# Altium PCB PCB_Car.PcbDoc
Units mil, origin at the board's own origin, x right, y up, seen from the top; angles counter-clockwise.
Board outline 4000 x 3000 mil, 2 copper layers (Top Layer, Bottom Layer); 14 components, 22 nets, 35 pads, 0 vias.
Unrouted connection lines stored in the file: 6.
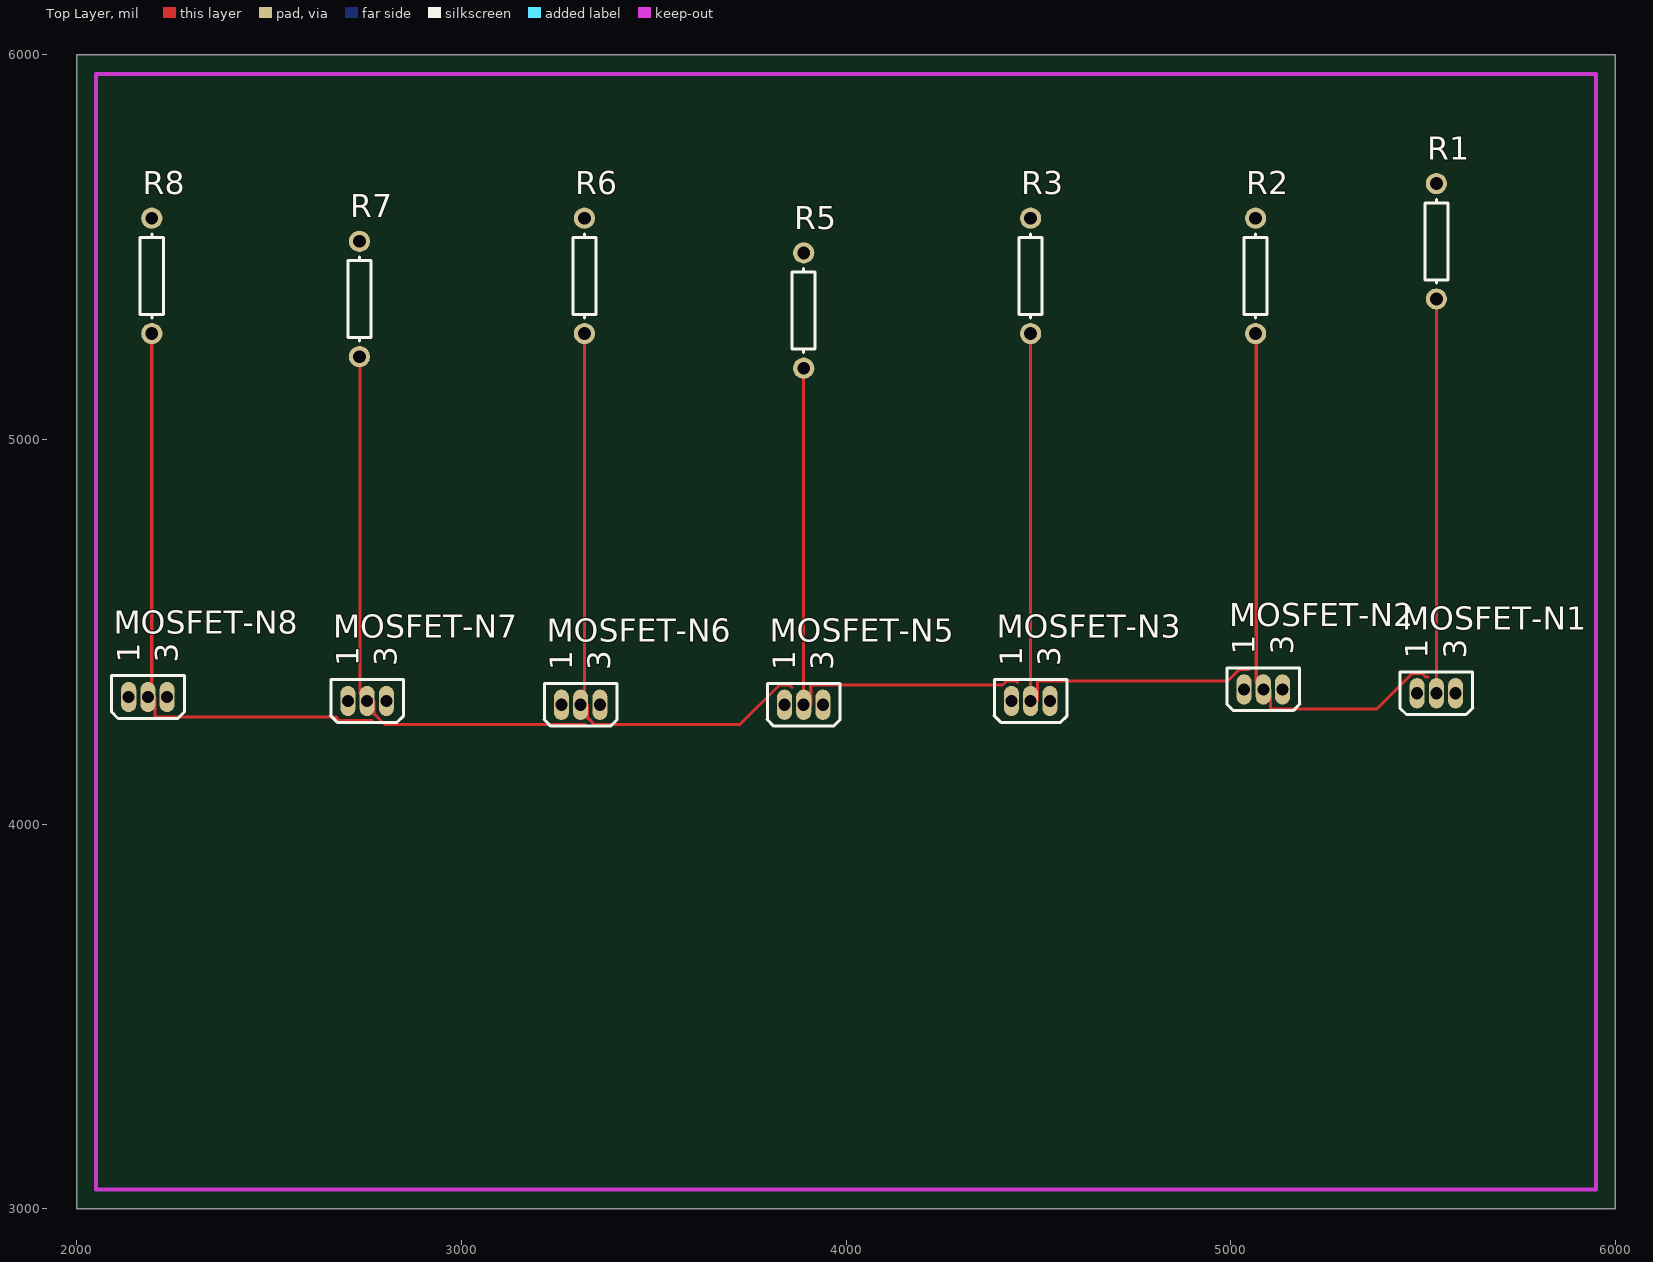
[diagram p0: Top Layer view]
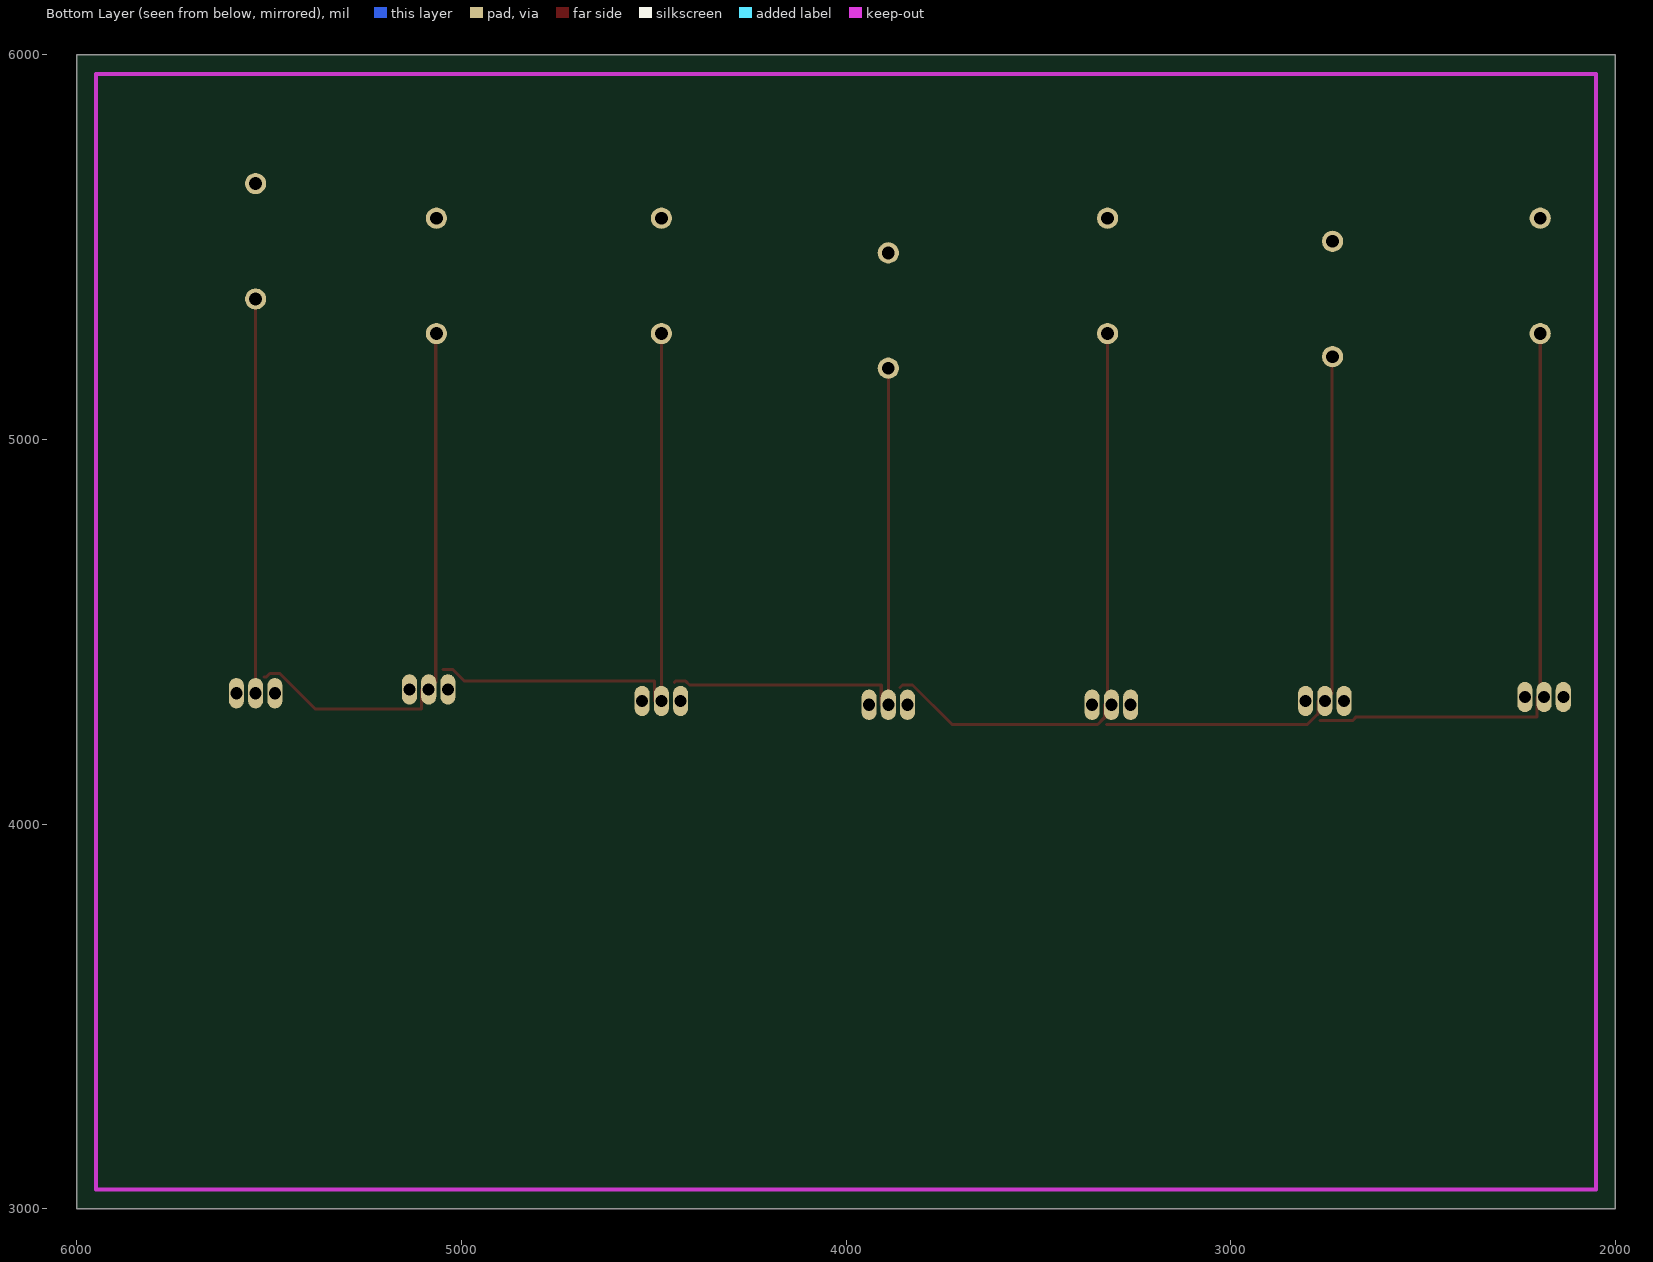
[diagram p1: Bottom Layer view, seen from below]

## Layer stack, top to bottom
Top Solder: solder mask 0.4, Solder Resist, Dk 3.5
Top Layer: signal copper 1.4
Dielectric 1: dielectric 12.6, FR-4, Dk 4.8
Bottom Layer: signal copper 1.4
Bottom Solder: solder mask 0.4, Solder Resist, Dk 3.5

## Board outline
2000,3000 6000,3000 6000,6000 2000,6000

## Design rules (kind name [scope] priority, off if disabled: settings)
Clearance [All] p1: gap=8
PolygonConnect [All] p1: connectstyle=Relief reliefconductorwidth=10 reliefentries=4 polygonreliefangle="90 Angle" airgapwidth=10
RoutingVias [All] p1: holewidth=25 width=40 viastyle="Through Hole" minholewidth=28 minwidth=50 maxholewidth=28 maxwidth=50
SolderMaskExpansion [All] p1: expansion=4
UnpouredPolygon [All] p1: allowunpoured=FALSE
Width [All] p1: maxlimit=8 minlimit=8 preferedwidth=8
29 further rules are at their usual default settings.

## Components (designator, comment, footprint, x,y, rotation, side; value= is the part's Value field where it differs from the comment)
MOSFET-N1 "" E3 5535,4340 r90 top
MOSFET-N2 "" E3 5085,4350 r90 top
MOSFET-N3 "" E3 4480,4320 r90 top
MOSFET-N5 "" E3 3890,4310 r90 top
MOSFET-N6 "" E3 3310,4310 r90 top
MOSFET-N7 "" E3 2755,4320 r90 top
MOSFET-N8 "" E3 2185,4330 r90 top
R1 "" AXIAL-0.3 5535,5515 r270 top
R2 "Res1" AXIAL-0.3 5065,5425 r270 top
R3 "Res1" AXIAL-0.3 4480,5425 r270 top
R5 "Res1" AXIAL-0.3 3890,5335 r270 top
R6 "Res1" AXIAL-0.3 3320,5425 r270 top
R7 "Res1" AXIAL-0.3 2735,5365 r270 top
R8 "Res1" AXIAL-0.3 2195,5425 r270 top

## Footprints (in the part's own frame and the unit in brackets; to place one, negate y for a bottom-side part, rotate by r counter-clockwise, add the part's x,y. Pads: shape width x height; smd on the part's side, far side on the other; paste and mask are expansions set on the pad)
AXIAL-0.3 [mm] "Axial Device, Thru-Hole; 2 Leads; 0.3 in Pin Spacing"
  round 1.4 hole 0.85: 1(-3.81,0) 2(3.81,0)
  silkscreen extent -2.77,-0.76 2.77,0.76
E3 [mm] "TO, Flat Index; 3 In-Line, Axial Leads; Body Dia. 4.6mm; Lead Dia. 0.5 mm (max)"
  oval 2x1 hole 0.8: 1(0,1.27) 2(0,0) 3(0,-1.27)
  silkscreen extent -1.41,-2.41 1.41,2.41

## Part data
MOSFET-N1 MOSFET-N2 MOSFET-N3 MOSFET-N5 MOSFET-N6 MOSFET-N7 MOSFET-N8: library part MOSFET-N, "N-Channel MOSFET"
R1: library part Res1, "Resistor"
R2 R3 R5 R6 R7 R8: "Resistor"

## Nets (pads, with @x,y where several pads share a name; then routed paths per layer and width w, separated by ;. In a path a pad name is that pad's centre, name@x,y a point inside that pad or via, vN(x,y) a via of type N, cw(c..) or ccw(c..) an arc to the next point about the centre after c; other vN are vias at no path point)
NetMOSFET-N1_1: MOSFET-N1.1
NetMOSFET-N1_2: MOSFET-N1.2 R1.2 | length 1025
  Top Layer w8: MOSFET-N1.2 R1.2
NetMOSFET-N1_3: MOSFET-N1.3 MOSFET-N2.3 MOSFET-N3.3 MOSFET-N5.3 MOSFET-N6.3 MOSFET-N7.3 MOSFET-N8.3
NetMOSFET-N2_1: MOSFET-N2.1
NetMOSFET-N2_2: MOSFET-N2.2 R2.2 | length 1428.7
  Top Layer w8: R2.2 5066.69,5273.31 MOSFET-N2.2@5066.69,4368.31 ; MOSFET-N2.2 5103.31,4350 5103.31,4298.63 5379.14,4298.63 5471.88,4391.37 5498.12,4391.37 5507.25,4382.25 5512.75,4382.25
NetMOSFET-N3_1: MOSFET-N3.1
NetMOSFET-N3_2: MOSFET-N3.2 R3.2 | length 1586.9
  Top Layer w8: R3.2 MOSFET-N3.2 4498.31,4320 4498.31,4371.37 4991.88,4371.37 5021.88,4401.37 5048.12,4401.37
NetMOSFET-N5_1: MOSFET-N5.1
NetMOSFET-N5_2: MOSFET-N5.2 R5.2 | length 1487.7
  Top Layer w8: R5.2 MOSFET-N5.2 3908.32,4310 3908.32,4361.37 4406.88,4361.37 4416.88,4371.37 4443.12,4371.37 4446,4368.49
NetMOSFET-N6_1: MOSFET-N6.1
NetMOSFET-N6_2: MOSFET-N6.2 R6.2 | length 1592
  Top Layer w8: MOSFET-N6.2 3328.32,4310 3328.32,4274.63 3329.75,4274.63 3345.75,4258.63 3724.14,4258.63 3826.88,4361.37 3853.12,4361.37 3859.75,4354.75 ; MOSFET-N6.2@3320,4320 R6.2
NetMOSFET-N7_1: MOSFET-N7.1
NetMOSFET-N7_2: MOSFET-N7.2 R7.2 | length 1491.6
  Top Layer w8: R7.2 2736.68,5213.31 MOSFET-N7.2@2736.68,4338.31 ; MOSFET-N7.2 2773.32,4320 2773.32,4284.63 2774.75,4284.63 2800.75,4258.63 3323.12,4258.63
NetMOSFET-N8_1: MOSFET-N8.1
NetMOSFET-N8_2: MOSFET-N8.2 R8.2 | length 1573.6
  Top Layer w8: MOSFET-N8.2 2203.32,4330 2203.32,4278.63 2673.32,4278.63 2683.32,4268.63 2768.12,4268.63 ; MOSFET-N8.2@2195,4340 R8.2
NetR1_1: R1.1
NetR2_1: R2.1
NetR3_1: R3.1
NetR5_1: R5.1
NetR6_1: R6.1
NetR7_1: R7.1
NetR8_1: R8.1

## Keep-outs
Keep-Out Layer:
  lines w10: 2050,3050 2050,5950 5950,5950 5950,3050 2050,3050

## Silkscreen, mask and mechanical layers (free items; w line width, h text height)
Drill Drawing:
  text ".LEGEND" at 2165,4265 h60
  text "Drill Drawing." at 2165,4165 h60

## Dimensions
2050,3050 to 2050,5950 on Mechanical 1
2050,3050 to 5950,3050 on Mechanical 1

## Text inside footprints (layer, text, board x,y; h text height)
MOSFET-N1: Top Overlay "1" at 5513.15,4429.57 h59.05 r90; Top Overlay "3" at 5612.28,4429.57 h59.05 r90
MOSFET-N2: Top Overlay "1" at 5063.15,4439.57 h59.05 r90; Top Overlay "3" at 5162.28,4439.57 h59.05 r90
MOSFET-N3: Top Overlay "1" at 4458.15,4409.57 h59.05 r90; Top Overlay "3" at 4557.28,4409.57 h59.05 r90
MOSFET-N5: Top Overlay "1" at 3868.15,4399.57 h59.05 r90; Top Overlay "3" at 3967.28,4399.57 h59.05 r90
MOSFET-N6: Top Overlay "1" at 3288.15,4399.57 h59.05 r90; Top Overlay "3" at 3387.28,4399.57 h59.05 r90
MOSFET-N7: Top Overlay "1" at 2733.15,4409.57 h59.05 r90; Top Overlay "3" at 2832.28,4409.57 h59.05 r90
MOSFET-N8: Top Overlay "1" at 2163.15,4419.57 h59.05 r90; Top Overlay "3" at 2262.28,4419.57 h59.05 r90